# Altium PCB fillcap.PcbDoc
Units mm, origin at the board's own origin, x right, y up, seen from the top; angles counter-clockwise.
Board outline 55.88 x 73.03 mm, 2 copper layers (Top Layer, Bottom Layer), stack 1.571 mm thick; 65 components, 55 nets, 221 pads, 64 vias.
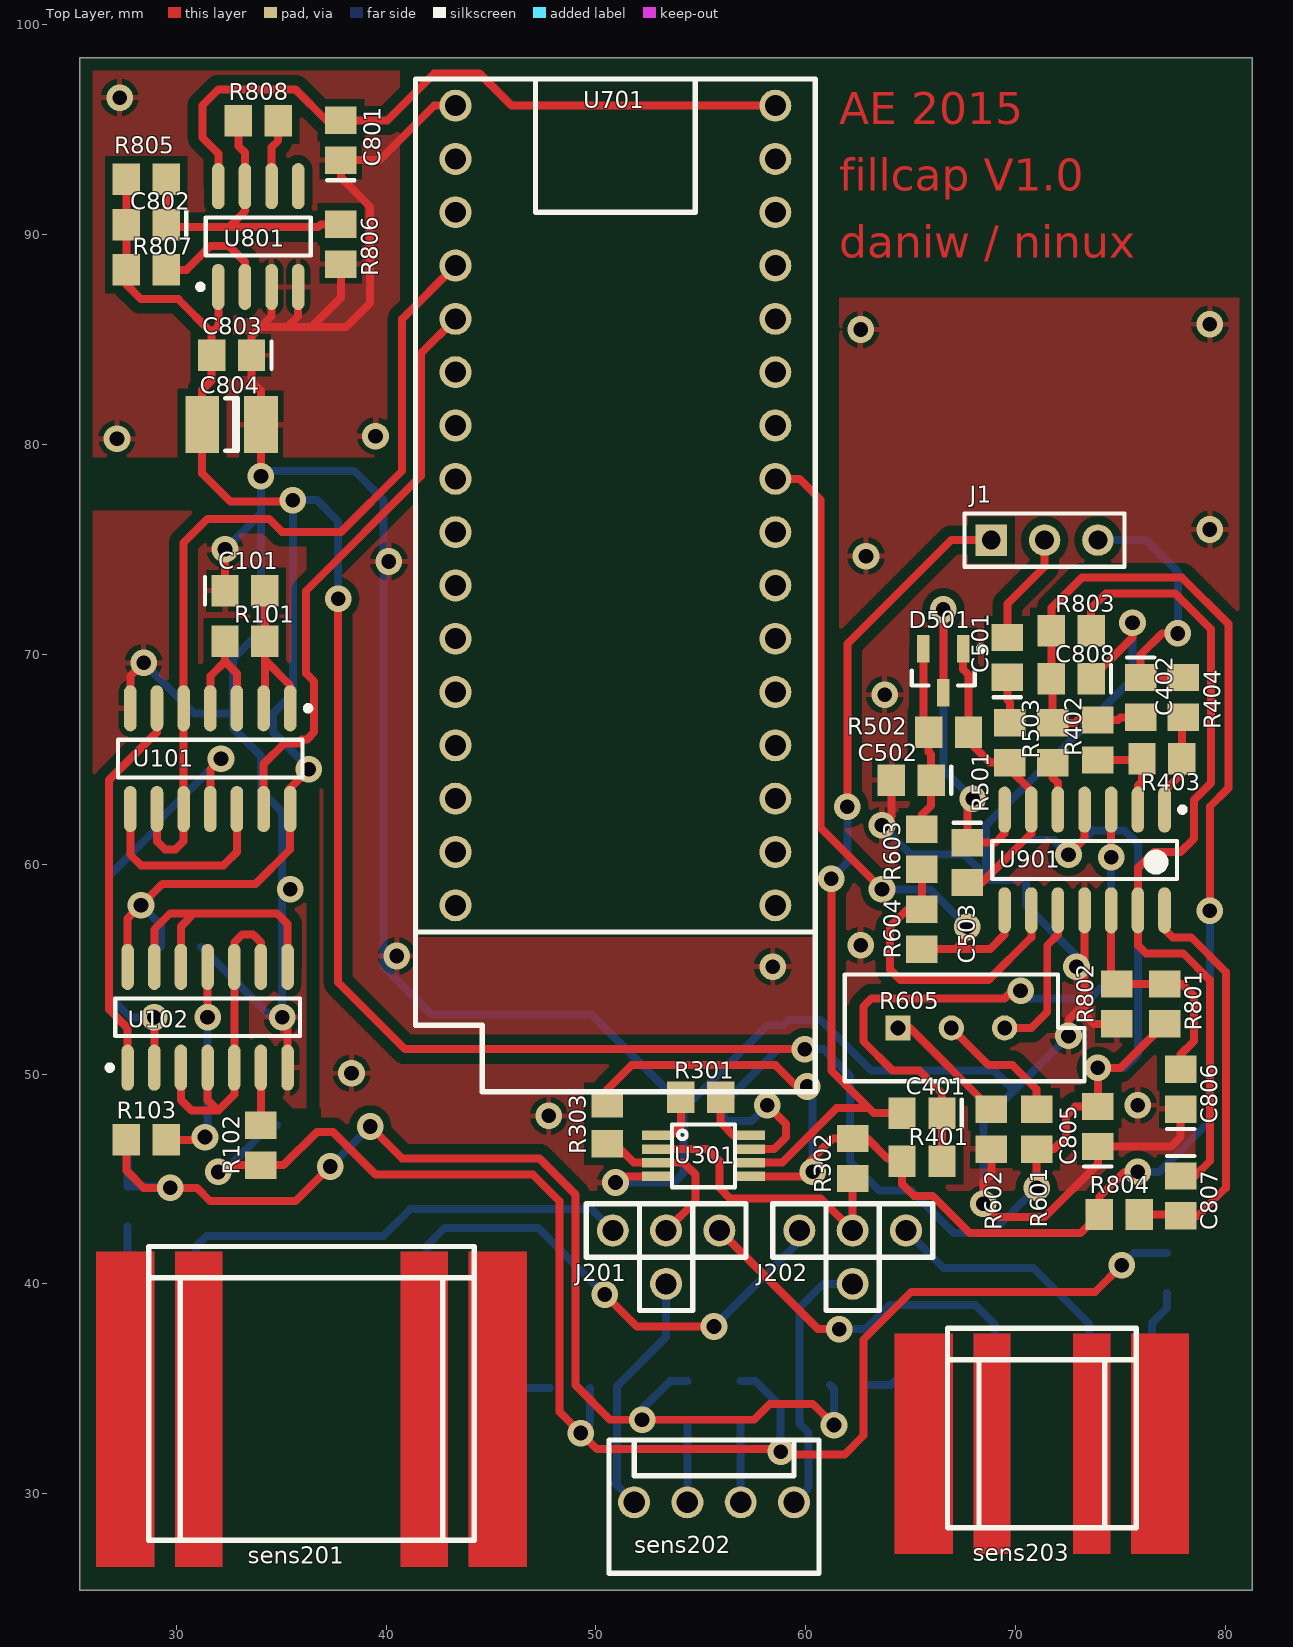
[diagram p0: Top Layer view]
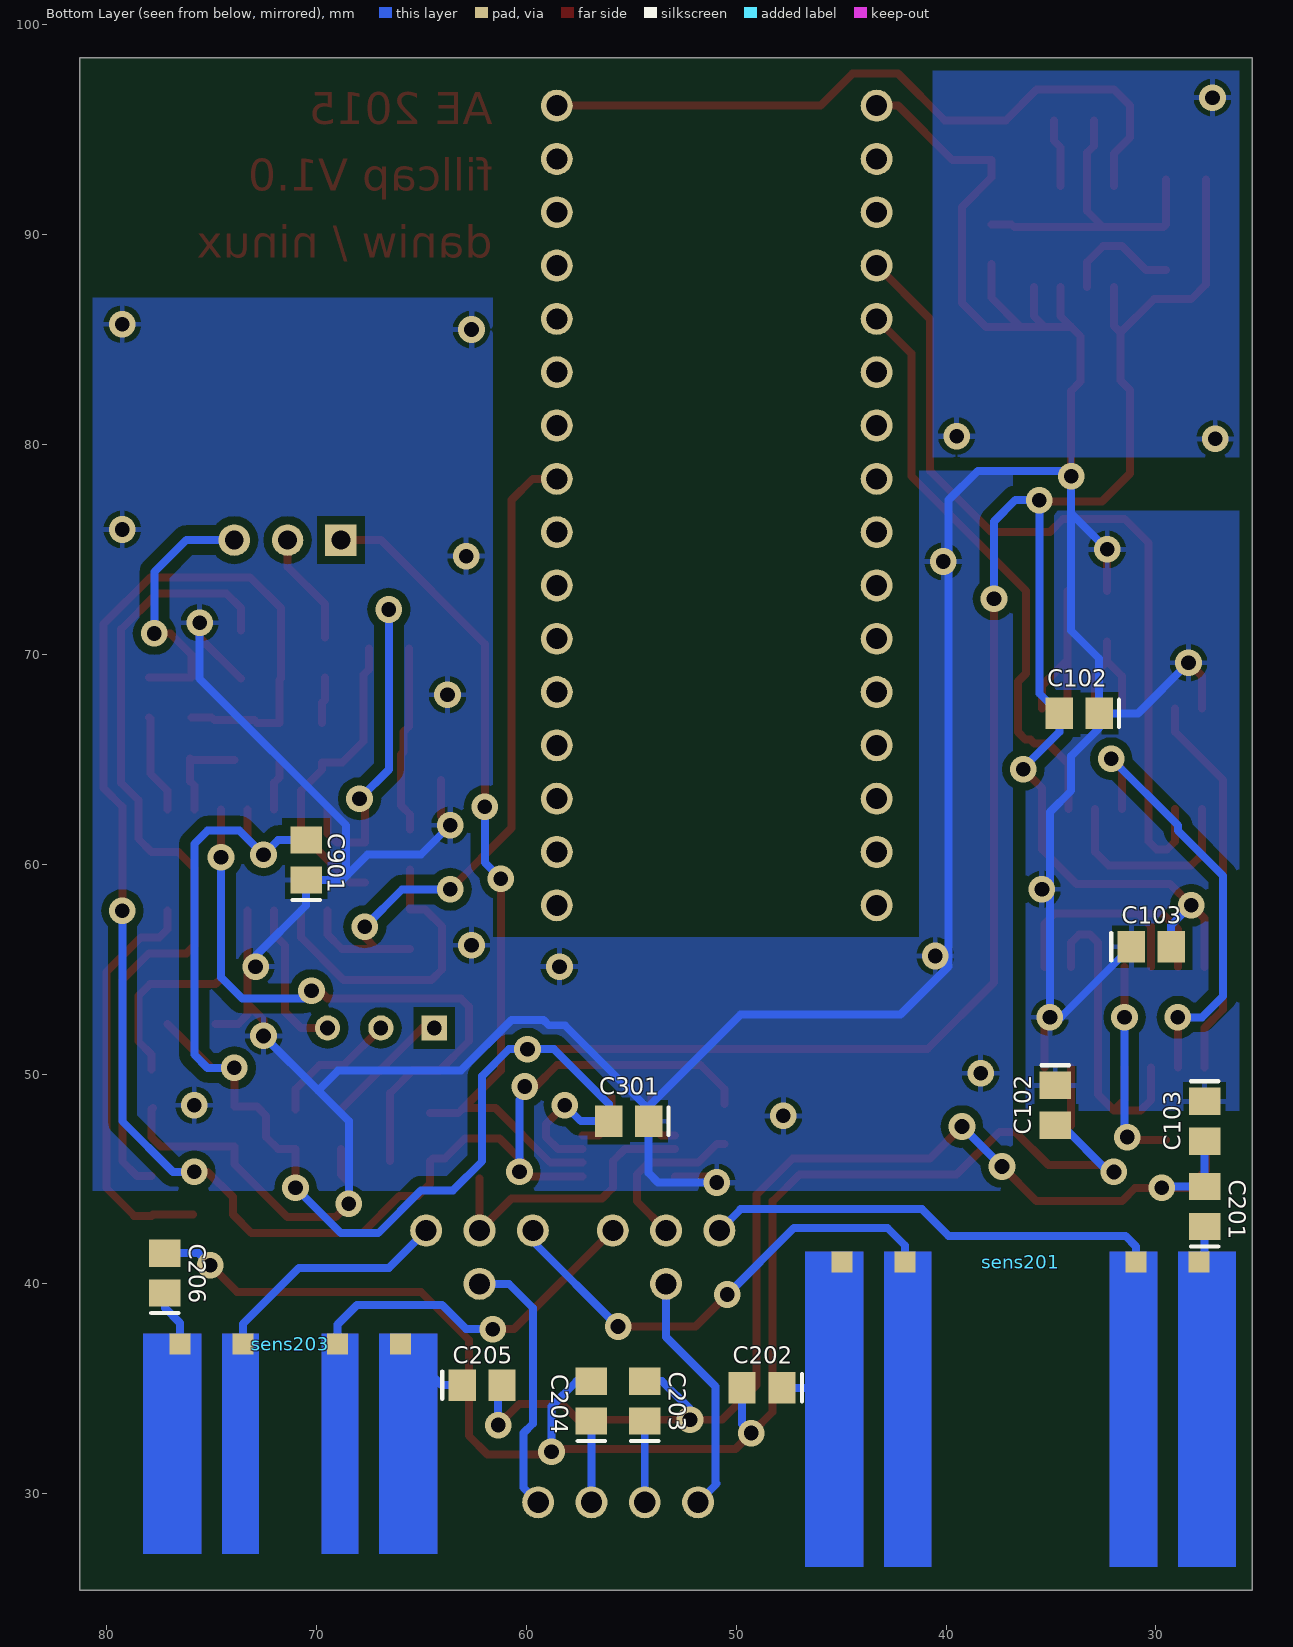
[diagram p1: Bottom Layer view, seen from below]

## Layer stack, top to bottom
Top Solder: solder mask 0.0102, Solder Resist, Dk 3.5
Top Layer: signal copper 0.0356
Dielectric 1: dielectric 1.5, FR-4, Dk 4.8
Bottom Layer: signal copper 0.0356
Bottom Solder: solder mask 0.0102, Solder Resist, Dk 3.5

## Board outline
25.4,25.4 25.4,98.425 81.28,98.425 81.28,25.4

## Design rules (kind name [scope] priority, off if disabled: settings)
Clearance [All] p1: gap=0.381 except(0.508: Track-Fill Track-Poly)
Height [All] p1: minheight=0 maxheight=45 prefheight=12.7
PolygonConnect [All] p1: connectstyle=Relief reliefconductorwidth=0.254 reliefentries=4 polygonreliefangle="90 Angle" airgapwidth=0.254
RoutingVias [All] p1: holewidth=0.711 width=1.27 viastyle="Through Hole" minholewidth=0.711 minwidth=1.27 maxholewidth=0.711 maxwidth=1.27
SilkToSilkClearance [All] p1 off: silktosilkclearance=0.254
SilkToSolderMaskClearance [IsPad] p1 off: minsilkscreentomaskgap=0.254 clearancetoexposedcopper=TRUE
SolderMaskExpansion [All] p1: expansion=0.102
UnpouredPolygon [All] p1: allowunpoured=FALSE
Width [All] p1: maxlimit=0.762 minlimit=0.381 preferedwidth=0.508
26 further rules are at their usual default settings.

## Components (designator, comment, footprint, x,y, rotation, side; value= is the part's Value field where it differs from the comment)
C101 "C0805" 0805 33.274,73.025 r0 top
C102 "C0805" 0805 34.798,48.514 r270 bottom
C102 "C0805" 0805 33.655,67.183 r0 bottom
C103 "C0805" 0805 27.686,47.752 r270 bottom
C103 "C0805" 0805 30.226,56.064 r180 bottom
C201 "C0805" 0805 27.686,43.688 r90 bottom
C202 "C0805" 0805 48.768,35.052 r0 bottom
C203 "C0805" 0805 54.356,34.417 r90 bottom
C204 "C0805" 0805 56.896,34.417 r90 bottom
C205 "C0805" 0805 62.103,35.179 r180 bottom
C206 "C0805" 0805 77.216,40.513 r90 bottom
C301 "C0805" 0805 55.118,47.752 r0 bottom
C401 "C0805" 0805 65.532,48.133 r180 top
C402 "C0805" 0805 75.946,67.945 r270 top
C501 "C0805" 0805 69.596,69.85 r90 top
C502 "C0805" 0805 65.024,64.008 r180 top
C503 "C0805" 0805 67.691,60.071 r270 top
C801 "C0805" 0805 37.846,94.488 r90 top
C802 "C0805" 0805 28.575,90.472 r180 top
C803 "C0805" 0805 32.639,84.249 r180 top
C804 "C1210" 1210 32.639,80.947 r180 top
C805 "C0805" 0805 73.914,47.498 r90 top
C806 "C0805" 0805 77.851,49.276 r90 top
C807 "C0805" 0805 77.851,44.196 r270 top
C808 "C0805" 0805 72.644,68.834 r180 top
C901 "C0805" 0805 70.485,60.198 r90 bottom
D501 "BAS70-04" SOT23_N 66.548,69.215 r270 top
J1 "Header 3" HDR1X3 68.834,75.438 r0 top
J201 "sensor_select" sens_select_jumper 53.34,42.545 r180 top
J202 "sensor_select" sens_select_jumper 62.23,42.545 r180 top
R101 "1k" ERA-0805 33.274,70.612 r180 top
R102 "100" ERA-0805 34.036,46.609 r270 top
R103 "100" ERA-0805 28.575,46.863 r180 top
R301 "10k" ERA-0805 54.991,48.895 r0 top
R302 "1M" ERA-0805 62.23,45.974 r270 top
R303 "1M" ERA-0805 50.546,47.625 r90 top
R401 "1k" ERA-0805 65.532,45.847 r180 top
R402 "10k" ERA-0805 73.914,65.913 r270 top
R403 "10k" ERA-0805 76.962,65.024 r0 top
R404 "1k" ERA-0805 77.978,67.945 r90 top
R501 "10k" ERA-0805 69.723,65.786 r270 top
R502 "10k" ERA-0805 66.802,66.294 r180 top
R503 "10k" ERA-0805 71.755,65.786 r270 top
R601 "10k" ERA-0805 70.993,47.371 r90 top
R602 "10k" ERA-0805 68.834,47.371 r270 top
R603 "10k" ERA-0805 65.532,60.706 r270 top
R604 "10k" ERA-0805 65.532,56.896 r270 top
R605 "RPot" VR5 66.929,52.197 r0 top
R801 "10k" ERA-0805 77.089,53.34 r90 top
R802 "10k" ERA-0805 74.803,53.34 r270 top
R803 "220" ERA-0805 72.644,71.12 r180 top
R804 "10" ERA-0805 74.93,43.307 r180 top
R805 "560k" ERA-0805 28.575,92.631 r0 top
R806 "330k" ERA-0805 37.846,89.535 r270 top
R807 "NB" ERA-0805 28.575,88.313 r180 top
R808 "NB" ERA-0805 33.909,95.425 r0 top
sens201 "fillcap_sensor_large" fillcap_sensor_large 36.449,34.036 r0 top
sens202 "fillcap_sensor_ext" fillcap_sensor_ext 55.626,29.591 r0 top
sens203 "fillcap_sensor_small" fillcap_sensor_small 71.247,32.385 r0 top
U101 "SN74HC132D" D014_N 31.623,65.024 r270 top
U102 "SN74HC132D" D014_N 31.496,52.705 r90 top
U301 "INA326EA" VSSOP8(0.65mm) 55.118,46.101 r0 top
U701 "tinyK20" tinyK20_full_mount 50.927,77.089 r0 top
U801 "LP2951ACM" M08A_N 33.909,89.903 r90 top
U901 "OPA4354A" D014_N 73.279,60.198 r270 top

## Footprints (in the part's own frame and the unit in brackets; to place one, negate y for a bottom-side part, rotate by r counter-clockwise, add the part's x,y. Pads: shape width x height; smd on the part's side, far side on the other; paste and mask are expansions set on the pad)
0805 [mm] "Chip Capacitor; Body 2.0 x 1.2 mm (LxW typ)"
  rect 1.3x1.5 smd: 1(-0.95,0) 2(0.95,0)
  silkscreen extent -1.9,-0.65 -1.9,0.65
1210 [mm] "Chip Capacitor; Body 3.2 x 2.5 mm (LxW typ)"
  rect 1.6x2.7 smd: 1(-1.4,0) 2(1.4,0)
  silkscreen extent -0.3,-1.25 0.3,1.25
D014_N [mm] "SOIC, 14-Leads, Body 8.7x3.9mm, Pitch 1.27mm, IPC Medium Density"
  oval 2.2x0.6 smd: 1(-2.4,3.81) 2(-2.4,2.54) 3(-2.4,1.27) 4(-2.4,0) 5(-2.4,-1.27) 6(-2.4,-2.54) 7(-2.4,-3.81) 8(2.4,-3.81) 9(2.4,-2.54) 10(2.4,-1.27) 11(2.4,0) 12(2.4,1.27) 13(2.4,2.54) 14(2.4,3.81)
  silkscreen extent -2.52,-4.4 0.9,4.79, body extent -1.95,-4.33 1.95,4.33, height 1.75
ERA-0805 [mm] "Chip Resistor; Body 2 x 1.3 mm (LxW typ)"
  rect 1.3x1.5 smd: 1(-0.95,0) 2(0.95,0)
fillcap_sensor_ext [mil]
  round 60 hole 40: 1(-150,0) 2(-50,0) 3(50,0) 4(150,0)
  silkscreen extent -197,-133 197,117, body extent -197,-125 197,125, height 420
fillcap_sensor_large [mm]
  rect 1x1 smd far side: 1(-5.5,7) 2(-8.5,7) 3(8.5,7) 4(5.5,7)
  Top Layer region: -7.5,7.5 -7.5,-7.5 -10.25,-7.5 -10.25,7.5
  Top Layer region: -6.5,7.5 -6.5,-7.5 -4.25,-7.5 -4.25,7.5
  Top Layer region: 6.5,7.5 6.5,-7.5 4.25,-7.5 4.25,7.5
  Top Layer region: 7.5,7.5 7.5,-7.5 10.25,-7.5 10.25,7.5
  Bottom Layer region: -10.25,7.5 -10.25,-7.5 -7.5,-7.5 -7.5,7.5
  Bottom Layer region: -6.5,7.5 -6.5,-7.5 -4.25,-7.5 -4.25,7.5
  Bottom Layer region: 4.25,7.5 4.25,-7.5 6.5,-7.5 6.5,7.5
  Bottom Layer region: 7.5,7.5 7.5,-7.5 10.25,-7.5 10.25,7.5
  silkscreen extent -7.75,-6.25 7.75,7.75, body extent -7.75,-6.25 7.75,7.75, height 44.5
fillcap_sensor_small [mm]
  rect 1x1 smd far side: 1(-2.25,4.75) 2(-5.25,4.75) 3(5.25,4.75) 4(2.25,4.75)
  Top Layer region: 4.25,5.25 4.25,-5.25 7,-5.25 7,5.25
  Top Layer region: 3.25,5.25 3.25,-5.25 1.5,-5.25 1.5,5.25
  Top Layer region: -3.25,5.25 -3.25,-5.25 -1.5,-5.25 -1.5,5.25
  Top Layer region: -4.25,5.25 -4.25,-5.25 -7,-5.25 -7,5.25
  Bottom Layer region: 4.25,5.25 4.25,-5.25 7,-5.25 7,5.25
  Bottom Layer region: 1.5,5.25 1.5,-5.25 3.25,-5.25 3.25,5.25
  Bottom Layer region: -3.25,5.25 -3.25,-5.25 -1.5,-5.25 -1.5,5.25
  Bottom Layer region: -7,5.25 -7,-5.25 -4.25,-5.25 -4.25,5.25
  silkscreen extent -4.5,-4 4.5,5.5, body extent -6,-4 6,5.5, height 20
HDR1X3 [mm] "Connector; Header; 3 Position"
  rect 1.5x1.5 hole 0.9: 1(0,0)
  round 1.5 hole 0.9: 2(2.54,0) 3(5.08,0)
  silkscreen extent -1.27,-1.27 6.35,1.27
M08A_N [mm] "SOIC, 8-Leads, Body 4.9x3.9mm, Pitch 1.27mm, IPC Medium Density"
  oval 2.2x0.6 smd: 1(-2.4,1.905) 2(-2.4,0.635) 3(-2.4,-0.635) 4(-2.4,-1.905) 5(2.4,-1.905) 6(2.4,-0.635) 7(2.4,0.635) 8(2.4,1.905)
  silkscreen extent -2.52,-2.5 0.9,2.88, body extent -2,-2.5 2,2.5, height 1.75
sens_select_jumper [mil]
  round 60 hole 39.37: 1(100,0) 2(0,100) 3(-100,0) 4(0,0)
  silkscreen extent -150,-50 150,150, body extent -150,-50 150,150, height 315
SOT23_N [mm] "SOT23, 3-Leads, Body 2.9x1.3mm, Pitch 0.95mm, Lead Span 2.3mm, IPC Medium Density"
  rect 1.3x0.6 smd: 1(-1.05,0.95) 2(-1.05,-0.95) 3(1.05,0)
  silkscreen extent -1.17,-1.5 0.7,1.93, body extent -0.7,-1.5 0.7,1.5, height 1.1
tinyK20_full_mount [mil]
  round 60 hole 39.37: 1(-300,750) 2(-300,650) 3(-300,550) 4(-300,450) 5(-300,350) 6(-300,250) 7(-300,150) 8(-300,50) 9(-300,-50) 10(-300,-150) 11(-300,-250) 12(-300,-350) 13(-300,-450) 14(-300,-550) 15(-300,-650) 16(-300,-750) 17(300,-750) 18(300,-650) 19(300,-550) 20(300,-450) 21(300,-350) 22(300,-250) 23(300,-150) 24(300,-50) 25(300,50) 26(300,150) 27(300,250) 28(300,350) 29(300,450) 30(300,550) 31(300,650) 32(300,750)
  silkscreen extent -375,-1100 375,800, body extent -375,-1100 375,800, height 531
VR5 [mm] "Thru-Hole; 3 Leads"
  rect 1.2x1.2 hole 0.7: 1(-2.54,0)
  round 1.2 hole 0.7: 2(0,0) 3(2.54,0)
  silkscreen extent -5.08,-2.54 6.35,2.54
VSSOP8(0.65mm) [mm]
  rect 1.45x0.45 smd: 1(-2.2,0.975) 2(-2.2,0.325) 3(-2.2,-0.325) 4(-2.2,-0.975) 5(2.2,-0.975) 6(2.2,-0.325) 7(2.2,0.325) 8(2.2,0.975)
  silkscreen extent -1.5,-1.5 1.5,1.5, body extent -2.5,-1.5 2.5,1.5, height 1.1

## Part data
C101 C102 C102 C103 C103 C201 C202 C203 C204 C205 C206 C301 C401 C402 C501 C502 C503 C801 C802 C803 C804 C805 C806 C807 C808 C901: "Ceramic Chip Capacitor - Standard"
D501: "Schottky Barrier Double Diode"
J1: "Header, 3-Pin"
R101 R102 R103 R301 R302 R303 R401 R402 R403 R404 R501 R502 R503 R601 R602 R603 R604 R801 R802 R803 R804 R805 R806 R807 R808: library part ERAS, "Metal Film Thermosensitive Chip Resistor, 0.56 Ohm to 10k Ohm Range, 5% Tolerance, 0805 Size, 0.1 W"
R605: "Potentiometer"
sens201 sens202 sens203: library part fillcap_sensor
U101 U102: "Quadruple Positive-NAND Gate with Schmitt-Trigger Inputs"
U801: "Series of Adjustable Micropower Voltage Regulators, 8-pin Narrow SOIC"
U901: library part LM324AD, "Quadruple Operational Amplifier"

## Via types
v1: diameter 1.27, hole 0.7, Top Layer to Bottom Layer, 61 vias
v2: diameter 1.27, hole 0.711, Top Layer to Bottom Layer, 3 vias

## Nets (pads, with @x,y where several pads share a name; then routed paths per layer and width w, separated by ;. In a path a pad name is that pad's centre, name@x,y a point inside that pad or via, vN(x,y) a via of type N, cw(c..) or ccw(c..) an arc to the next point about the centre after c; other vN are vias at no path point)
5V: C801.2 U701.32 U801.8 | length 33.9
  Top Layer w0.381: U801.8 32.004,93.853 31.242,94.615 31.242,96.139 32.004,96.901 35.687,96.901 37.15,95.438 C801.2 40.066,95.438 42.291,97.663 44.45,97.663 45.974,96.139 U701.32
GND: C101.1 C102.1 C103.1 C301.1 C502.2 C801.1 C803.1 C804.1 C805.1 C806.1 C808.1 C901.1 R602.2 R802.2 R806.2 U101.7 U102.7 U301.4 U701.1 U801.3 U801.4 U901.11 | length 224
  Top Layer w0.381: U101.7 27.813,68.961 v1(28.448,69.596) ; C101.1 v1(32.324,74.996) ; v1(34.036,78.486) 34.036,78.365 34.039,78.362 C804.1 34.039,82.547 33.589,82.997 C803.1 33.589,85.151 34.067,85.629 ; U801.3 34.544,86.106 34.067,85.629 ; v1(35.052,52.705) 35.306,52.451 U102.7 ; U801.4 35.814,86.106 35.306,85.598 ; R806.2 37.846,86.995 36.449,85.598 ; U701.1 42.291,96.139 39.69,93.538 C801.1 37.846,92.71 39.243,91.313 39.243,86.741 38.1,85.598 36.449,85.598 ; v1(50.927,44.831) 51.222,45.126 U301.4 ; v1(63.627,61.849) 64.074,62.296 C502.2 ; R602.2 68.834,45.212 68.453,44.831 v1(68.453,43.815) 69.088,43.18 71.374,43.18 73.914,45.72 C805.1 77.409,46.548 77.851,46.99 C806.1 C806.1@77.79,48.387 ; v1(72.517,51.816) 72.517,52.578 73.279,53.34 ; U901.11 73.279,55.499 v1(72.898,55.118) 73.279,54.737 73.279,53.34 ; C808.1 75.565,70.805 v1(75.565,71.501) ; R802.2 73.721,52.39 73.279,52.832 73.279,53.34 ; 34.067,85.629 34.097,85.598 35.306,85.598 ; 35.306,85.598 36.449,85.598
  Bottom Layer w0.381: v1(28.448,69.596) 30.861,67.183 C102.1@32.705,67.183 ; C103.1@31.176,56.064 34.535,52.705 v1(35.052,52.705) 35.052,62.484 34.036,63.5 34.036,65.151 32.705,66.482 C102.1@32.705,67.183 ; v1(32.324,74.996) 34.036,76.708 ; v1(50.927,44.831) 53.721,44.831 54.168,45.278 C301.1 C301.1@54.168,48.326 ; v1(63.627,61.849) 65.024,60.452 67.564,60.452 68.58,59.436 ; v1(68.453,43.815) 68.453,47.752 69.913,49.212 ; v1(72.517,51.816) 69.913,49.212 ; v1(72.898,55.118) 72.898,55.626 70.485,58.039 C901.1 68.768,59.248 68.58,59.436 ; v1(75.565,71.501) 75.565,68.834 68.58,61.849 68.58,59.436 ; C102.1@32.705,67.183 32.705,69.789 34.036,71.12 34.036,76.708 ; 34.036,76.708 v1(34.036,78.486) 34.29,78.74 38.481,78.74 39.878,77.343 39.878,55.118 42.164,52.832 49.784,52.832 54.168,48.448 C301.1@54.168,48.326 ; C301.1@54.168,48.326 58.166,52.324 58.928,52.324 59.182,52.578 60.706,52.578 63.119,50.165 68.961,50.165 69.913,49.212
  other v1: 47.752,48.006 75.819,48.514 38.354,50.038 58.42,55.118 40.513,55.626 62.611,56.134 35.433,58.801 63.754,68.072 40.132,74.422 62.865,74.676 79.248,75.946 27.178,80.264 39.497,80.391 62.611,85.471 79.248,85.725 27.305,96.52
NetC101_2: C101.2 R101.1 U101.1 U101.2 | length 8.3
  Top Layer w0.381: U101.2@34.224,67.485 34.224,69.723 ; C101.2 34.224,69.723 ; U101.1 35.433,68.514 34.224,69.723
NetC102_2: C102.2@34.798,47.564 C202.2 C204.2 C206.2 R102.2 | length 75.3
  Top Layer w0.381: v2(32.004,45.339) 32.324,45.659 R102.2 35.118,45.659 36.703,47.244 37.465,47.244 39.497,45.212 46.99,45.212 48.26,43.942 48.26,33.909 v1(49.276,32.893) 50.038,32.131 v1@58.674,32.131 ; v1(58.801,32.004) 58.928,31.877 61.849,31.877 62.738,32.766 62.738,37.338 65.024,39.624 73.787,39.624 v1(75.057,40.894)
  Bottom Layer w0.381: v2(32.004,45.339) 32.258,45.339 34.483,47.564 C102.2@34.798,47.564 ; v1(49.276,32.893) 49.718,33.335 C202.2 ; C204.2 57.597,35.367 58.801,34.163 v1(58.801,32.004) ; v1(75.057,40.894) 75.626,41.463 C206.2
NetC103_2: C103.2@27.686,46.802 C201.2 C203.2 C205.2 R103.2 | length 58.5
  Top Layer w0.381: R103.2 27.625,45.4 28.448,44.577 v1(29.718,44.577) 30.988,44.577 31.623,43.942 35.687,43.942 v1(37.338,45.593) ; v1(39.243,47.498) 40.767,45.974 47.306,45.974 49.022,44.258 49.022,35.179 50.673,33.528 v1(52.197,33.528) 57.531,33.528 58.293,34.29 60.325,34.29 v1(61.341,33.274)
  Bottom Layer w0.381: C103.2@27.686,46.802 C201.2 29.657,44.638 v1(29.718,44.577) ; v1(37.338,45.593) v1(39.243,47.498) ; v1(52.197,33.528) 52.197,34.036 53.528,35.367 C203.2 ; C205.2 61.341,34.991 v1(61.341,33.274)
NetC201_1: C201.1 sens201.2 | length 1.8
  Bottom Layer w0.381: C201.1 27.686,41.299 sens201.2
NetC202_1: C202.1 sens201.3 | length 2.4
  Bottom Layer w0.381: 45.466,35.052 C202.1
NetC203_1: C203.1 sens202.2 | length 3.9
  Bottom Layer w0.381: sens202.2 C203.1
NetC204_1: C204.1 sens202.3 | length 3.9
  Bottom Layer w0.381: sens202.3 C204.1
NetC205_1: C205.1 sens203.2 | length 3.8
  Bottom Layer w0.381: C205.1 64.041,35.179 sens203.2
NetC206_1: C206.1 sens203.3 | length 2.7
  Bottom Layer w0.381: sens203.3 76.497,38.143 77.216,38.862 C206.1
NetC401_1: C401.1 R401.1 U901.3 | length 30.4
  Top Layer w0.381: R401.1 C401.1 66.482,49.088 65.405,50.165 64.135,50.165 62.738,51.562 62.738,53.213 63.119,53.594 69.469,53.594 69.85,53.975 v1(70.231,53.975) ; v1(74.549,60.325) U901.3
  Bottom Layer w0.381: v1(70.231,53.975) 70.612,53.594 73.533,53.594 74.549,54.61 v1(74.549,60.325)
NetC401_2: C401.2 J1.1 U301.6 | length 40.5
  Top Layer w0.381: U301.6 58.857,45.776 61.468,48.387 62.992,48.387 ; v1(61.214,59.309) 61.214,50.165 62.992,48.387 ; v1(61.976,62.738) 61.976,70.485 66.929,75.438 J1.1 ; C401.2 63.246,48.133 62.992,48.387
  Bottom Layer w0.381: v1(61.214,59.309) 61.976,60.071 v1(61.976,62.738)
NetC402_1: C402.1 J1.3 R404.2 | length 12.7
  Top Layer w0.381: v1(77.724,70.993) 76.962,70.993 75.946,69.977 C402.1 R404.2
  Bottom Layer w0.381: J1.3 76.2,75.438 77.724,73.914 v1(77.724,70.993)
NetC501_1: C501.1 R501.1 | length 2.2
  Top Layer w0.381: C501.1 69.596,67.818 69.723,67.691 R501.1
NetC501_2: C501.2 J1.2 | length 5.4
  Top Layer w0.381: C501.2 69.596,72.39 71.374,74.168 J1.2
NetC502_1: C502.1 D501.2 R502.2 R603.1 | length 8.9
  Top Layer w0.381: R603.1 65.532,62.357 65.974,62.799 C502.1 65.974,65.217 65.852,65.339 R502.2 65.598,66.548 D501.2
NetC503_1: C503.1 D501.3 U901.7 | length 18.9
  Top Layer w0.381: D501.3 v1(66.548,72.136) ; v1(67.945,63.119) 67.691,62.865 C503.1 69.022,61.021 69.469,61.468 U901.7
  Bottom Layer w0.381: v1(66.548,72.136) 66.548,64.516 v1(67.945,63.119)
NetC503_2: C503.2 D501.1 R501.2 R502.1 U901.6 | length 14.7
  Top Layer w0.381: D501.1 67.498,69.281 67.752,69.027 R502.1 67.752,65.852 68.768,64.836 R501.2 69.723,64.516 70.739,63.5 U901.6 70.739,61.468 68.392,59.121 C503.2
NetC802_1: C802.1 R805.2 R806.1 R808.1 U801.7 | length 16.1
  Top Layer w0.381: R805.2 C802.1 29.652,90.345 32.512,90.345 ; R808.1 32.959,94.216 33.274,93.901 U801.7 33.274,91.107 32.512,90.345 ; R806.1 36.891,90.485 36.751,90.345 32.512,90.345
NetC806_2: C806.2 R801.2 R802.1 U901.12 | length 11.3
  Top Layer w0.381: U901.12 74.549,54.544 R802.1 R801.2 77.917,54.29 78.486,53.721 78.486,51.562 77.851,50.927 C806.2
NetC807_1: C807.1 R803.1 U901.13 | length 39.5
  Top Layer w0.381: R803.1 73.594,72.197 74.295,72.898 77.597,72.898 79.3,71.195 79.3,63.867 78.486,63.054 78.486,61.214 77.851,60.579 76.581,60.579 75.819,59.817 U901.13 75.819,56.134 76.2,55.753 77.978,55.753 79.248,54.483 79.248,45.847 78.547,45.146 C807.1
NetC807_2: C807.2 R804.1 U901.14 | length 19.7
  Top Layer w0.381: R804.1 77.79,43.307 C807.2 78.679,43.246 80.01,44.577 80.01,54.864 78.359,56.515 77.47,56.515 77.089,56.896 U901.14
NetJ201_1: J201.1 sens201.1 | length 21.8
  Bottom Layer w0.381: sens201.1 30.949,41.783 31.457,42.291 39.878,42.291 41.148,43.561 49.784,43.561 J201.1
NetJ201_2: J201.2 sens202.1 | length 11.8
  Bottom Layer w0.381: sens202.1 50.927,30.48 50.99,30.543 50.99,35.115 53.34,37.465 J201.2
NetJ201_3: J201.3 sens203.1 | length 17.7
  Top Layer w0.381: J201.3 60.58,37.845 v1(61.596,37.845)
  Bottom Layer w0.381: v1(61.596,37.845) v1@61.595,37.846 ; sens203.1 68.997,38.064 68.072,38.989 64.008,38.989 62.865,37.846 v1@61.595,37.846 ; v1@61.595,37.846 61.341,37.846 61.214,37.973 61.468,37.973 v1@61.595,37.846
NetJ201_4: J201.4 R303.1 U301.3 | length 8
  Top Layer w0.381: R303.1 50.917,46.675 51.816,45.776 U301.3 54.173,45.776 54.737,45.212 54.737,43.942 J201.4
NetJ202_1: J202.1 sens201.4 | length 23
  Top Layer w0.381: v1(50.419,39.497) 51.943,37.973 v1(55.626,37.973)
  Bottom Layer w0.381: sens201.4 41.949,41.822 42.799,42.672 47.244,42.672 v1(50.419,39.497) ; v1(55.626,37.973) 59.69,42.037 J202.1
NetJ202_2: J202.2 sens202.4 | length 12.8
  Bottom Layer w0.381: sens202.4 60.134,30.29 60.134,32.893 59.69,33.337 59.69,38.862 60.833,40.005 J202.2
NetJ202_3: J202.3 sens203.4 | length 11.5
  Bottom Layer w0.381: J202.3 66.548,40.767 70.83,40.767 73.497,38.1 sens203.4
NetJ202_4: J202.4 R302.2 U301.2 | length 14.1
  Top Layer w0.381: U301.2 55.301,46.426 55.88,45.847 55.88,44.577 56.388,44.069 60.706,44.069 J202.4 R302.2
NetR101_2: R101.2 U101.3 U101.4 | length 5.9
  Top Layer w0.381: U101.4 31.623,68.956 32.324,69.657 ; R101.2 32.324,69.657 ; U101.3 32.893,69.088 32.324,69.657
NetR102_1: R102.1 U102.6 | length 2.7
  Top Layer w0.381: R102.1 U102.6
NetR103_1: R103.1 U102.11 | length 10.1
  Top Layer w0.381: R103.1 31.242,46.863 v2(31.369,46.99) ; v2(31.496,52.705) U102.11
  Bottom Layer w0.381: v2(31.369,46.99) 31.496,47.117 v2(31.496,52.705)
NetR301_1: R301.1 U301.1 | length 2.7
  Top Layer w0.381: U301.1 53.553,47.076 54.041,47.564 R301.1
NetR301_2: R301.2 U301.8 | length 2.8
  Top Layer w0.381: R301.2 55.941,47.691 56.556,47.076 U301.8
NetR402_2: R402.2 R403.1 U901.2 | length 4.6
  Top Layer w0.381: R402.2 75.951,64.963 R403.1 76.012,63.947 75.819,63.754 U901.2
NetR403_2: R403.2 R404.1 U901.1 | length 4.8
  Top Layer w0.381: U901.1 77.089,63.5 77.912,64.323 R403.2 77.912,66.929 R404.1
NetR503_2: R503.2 U901.5 | length 2.3
  Top Layer w0.381: R503.2 71.755,64.135 72.009,63.881 U901.5
NetR601_2: R601.2 R605.2 | length 6.2
  Top Layer w0.381: R605.2 68.707,50.419 69.85,50.419 70.993,49.276 R601.2
NetR602_1: R602.1 R605.1 | length 6.1
  Top Layer w0.381: R605.1 64.958,52.197 R602.1
NetR603_2: R603.2 R604.1 U901.9 | length 14.9
  Top Layer w0.381: R603.2 R604.1 64.831,57.846 64.008,57.023 64.008,54.991 64.516,54.483 68.707,54.483 70.739,56.515 U901.9
NetR604_2: R604.2 U701.25 U901.8 | length 33.8
  Top Layer w0.381: U701.25 59.69,78.359 60.706,77.343 60.706,61.722 v1(63.627,58.801) ; R604.2 67.122,55.946 ; v1(67.691,57.023) 67.691,56.515 67.122,55.946 ; U901.8 69.469,56.642 68.773,55.946 67.122,55.946
  Bottom Layer w0.381: v1(63.627,58.801) 65.913,58.801 v1(67.691,57.023)
NetR605_3: R605.3 U901.10 | length 7.4
  Top Layer w0.381: R605.3 70.739,52.197 71.501,52.959 71.501,56.134 72.009,56.642 U901.10
NetR807_1: R807.1 U801.2 | length 5.7
  Top Layer w0.381: R807.1 30.48,88.313 31.623,89.456 32.512,89.456 33.274,88.694 U801.2
NetR808_2: R808.2 U801.6 | length 3.3
  Top Layer w0.381: U801.6 34.544,94.155 34.859,94.47 R808.2
NetU101_5: U101.5 U101.9 U101.10 U701.4 | length 40.5
  Top Layer w0.381: U101.9 29.083,61.087 29.464,60.706 29.972,60.706 30.353,61.087 U101.10 U101.5 30.353,75.311 31.496,76.454 34.417,76.454 35.052,75.819 37.846,75.819 40.767,78.74 40.767,85.979 U701.4
NetU101_6: U101.6 U102.1 | length 18.4
  Top Layer w0.381: U102.1 27.686,52.197 26.797,53.086 26.797,64.008 29.083,66.294 U101.6
NetU101_8: U101.8 U101.12 | length 9.8
  Top Layer w0.381: U101.8 27.813,60.452 28.321,59.944 32.258,59.944 32.893,60.579 U101.12
NetU101_11: U101.11 U102.2 | length 21.1
  Top Layer w0.381: U102.2 v1(28.956,52.705) ; U101.11 31.623,64.516 v1(32.131,65.024)
  Bottom Layer w0.381: v1(28.956,52.705) 27.813,52.705 26.797,53.721 26.797,59.436 28.956,61.595 28.956,61.849 v1(32.131,65.024)
NetU101_13: U101.13 U701.5 | length 28
  Top Layer w0.381: U101.13 34.163,64.77 35.145,65.752 35.794,65.752 35.986,65.945 36.227,65.945 36.576,66.294 36.576,68.707 36.195,69.088 36.195,73.025 41.656,78.486 41.656,84.328 U701.5
NetU102_3: U102.3 U102.4 U102.5 U102.9 U102.10 | length 16.8
  Top Layer w0.381: U102.3 30.226,48.768 30.734,48.26 32.004,48.26 ; U102.4 31.496,48.768 32.004,48.26 ; U102.9 34.036,56.261 33.655,56.642 33.147,56.642 32.766,56.261 U102.10 U102.5 32.766,49.022 32.004,48.26
NetU102_8: U102.8 U102.12 U102.13 | length 13.5
  Top Layer w0.381: U102.13 28.956,56.896 29.718,57.658 30.861,57.658 ; U102.12 30.226,57.023 30.861,57.658 ; U102.8 35.306,57.15 34.798,57.658 30.861,57.658
VCC: C102.2@34.605,67.183 C103.2@29.276,56.064 C301.2 C802.2 C803.2 C804.2 C805.2 C901.2 R601.1 R801.1 R805.1 R807.2 U101.14 U102.14 U301.7 U801.1 U901.4 | length 167.2
  Top Layer w0.381: R805.1 R807.2 27.625,87.612 28.321,86.916 30.099,86.916 31.689,85.326 ; U102.14 27.686,57.404 v1(28.321,58.039) 29.337,59.055 33.782,59.055 35.433,60.706 U101.14 35.433,63.627 v1(36.322,64.516) ; U801.1 32.004,85.641 31.689,85.326 ; v1(35.56,77.343) 35.496,77.279 32.575,77.279 31.239,78.616 C804.2 31.239,82.595 31.689,83.045 C803.2 31.689,85.326 ; v1(37.719,72.644) 37.719,54.356 40.894,51.181 v1(59.944,51.181) ; U301.7 58.491,46.426 59.055,46.99 59.055,47.625 v1(58.166,48.514) ; v1(70.993,44.577) R601.1 71.821,46.421 72.39,46.99 72.39,48.006 72.832,48.448 C805.2 v1(73.914,50.292) 74.991,50.292 R801.1 ; v1(72.517,60.452) 73.279,61.214 U901.4
  Bottom Layer w0.381: v1(28.321,58.039) 29.276,57.084 C103.2@29.276,56.064 ; v1(36.322,64.516) 36.322,64.577 34.605,66.294 34.605,67.183 35.56,68.138 v1(35.56,77.343) 36.703,77.343 37.719,76.327 v1(37.719,72.644) ; v1(58.166,48.514) 57.404,47.752 C301.2 56.068,48.575 58.674,51.181 v1(59.944,51.181) 60.833,51.181 62.103,49.911 62.103,45.847 63.5,44.45 65.024,44.45 67.056,42.418 68.834,42.418 v1(70.993,44.577) ; C901.2 71.821,61.148 v1(72.517,60.452) 73.66,61.595 75.184,61.595 75.819,60.96 75.819,50.927 75.184,50.292 v1(73.914,50.292)
VCC2: C402.2 C808.2 R302.1 R303.2 R401.2 R402.1 R503.1 R803.2 R804.2 U301.5 | length 86.2
  Top Layer w0.381: R303.2 50.546,49.276 51.689,50.419 58.547,50.419 59.563,49.403 v1(60.071,49.403) ; U301.5@57.318,45.106 60.092,45.106 v1(60.325,45.339) ; v1@60.198,45.847 61.275,46.924 R302.1 62.931,46.924 63.881,45.974 64.455,45.974 R401.2 64.582,44.765 65.151,44.196 66.04,44.196 67.818,42.418 73.091,42.418 R804.2 73.98,44.135 75.184,45.339 v1(75.819,45.339) ; C402.2 74.996,66.995 74.864,66.863 R402.1 72.959,66.863 72.832,66.736 R503.1 71.755,68.773 C808.2 R803.2 71.694,72.202 73.152,73.66 77.913,73.66 80.137,71.436 80.137,63.627 79.248,62.738 v1(79.248,57.785)
  Bottom Layer w0.381: v1(60.325,45.339) 60.325,48.768 ; v1(75.819,45.339) 76.835,45.339 79.248,47.752 v1(79.248,57.785)
pads on no net: U701.2 U701.3 U701.6 U701.7 U701.8 U701.9 U701.10 U701.11 U701.12 U701.13 U701.14 U701.15 U701.16 U701.17 U701.18 U701.19 U701.20 U701.21 U701.22 U701.23 U701.24 U701.26 U701.27 U701.28 U701.29 U701.30 U701.31 U801.5

## Polygon pours and split planes (outlines as drawn)
GND on Bottom Layer "GND_Analog_BOT" (solid, remove dead copper, pour order 11): 36.83,78.74 36.83,44.45 80.645,44.45 80.645,86.995 61.595,86.995 61.595,56.515 41.275,56.515 41.275,78.74
GND on Bottom Layer "GND_DIG_BOT" (solid, remove dead copper, pour order 4): 26.035,48.26 26.035,76.835 36.195,76.835 36.195,48.26
GND on Top Layer "GND_Analog_TOP" (solid, remove dead copper, pour order 13): 36.83,44.45 80.645,44.45 80.645,86.995 61.595,86.995 61.595,56.515 41.529,56.515 41.529,78.74 36.83,78.74
GND on Top Layer "GND_Power_TOP" (solid, remove dead copper, pour order 9): 26.035,97.79 26.035,79.375 40.64,79.375 40.64,97.79 26.035,97.79
GND on Bottom Layer "GND_Power_BOT" (solid, remove dead copper, pour order 7): 26.035,97.79 26.035,79.375 40.64,79.375 40.64,97.79 26.035,97.79
GND on Top Layer "GND_DIG_TOP" (solid, remove dead copper, pour order 2): 26.035,48.26 26.035,76.835 36.195,76.835 36.195,48.26 26.035,48.26

## Other copper
Top Layer:
  text "AE 2015" at 61.595,95.25 h1.52
  text "fillcap V1.0" at 61.595,92.075 h1.52
  text "daniw / ninux" at 61.595,88.9 h1.52

## Silkscreen, mask and mechanical layers (free items; w line width, h text height)
Top Solder:
  text "AE 2015" at 61.595,95.25 h1.52
  text "fillcap V1.0" at 61.595,92.075 h1.52
  text "daniw / ninux" at 61.595,88.9 h1.52
Mechanical 1:
  the board outline again, w0.254